# Allegro board PMOD2BNCSIMPLE_v1_03.brd
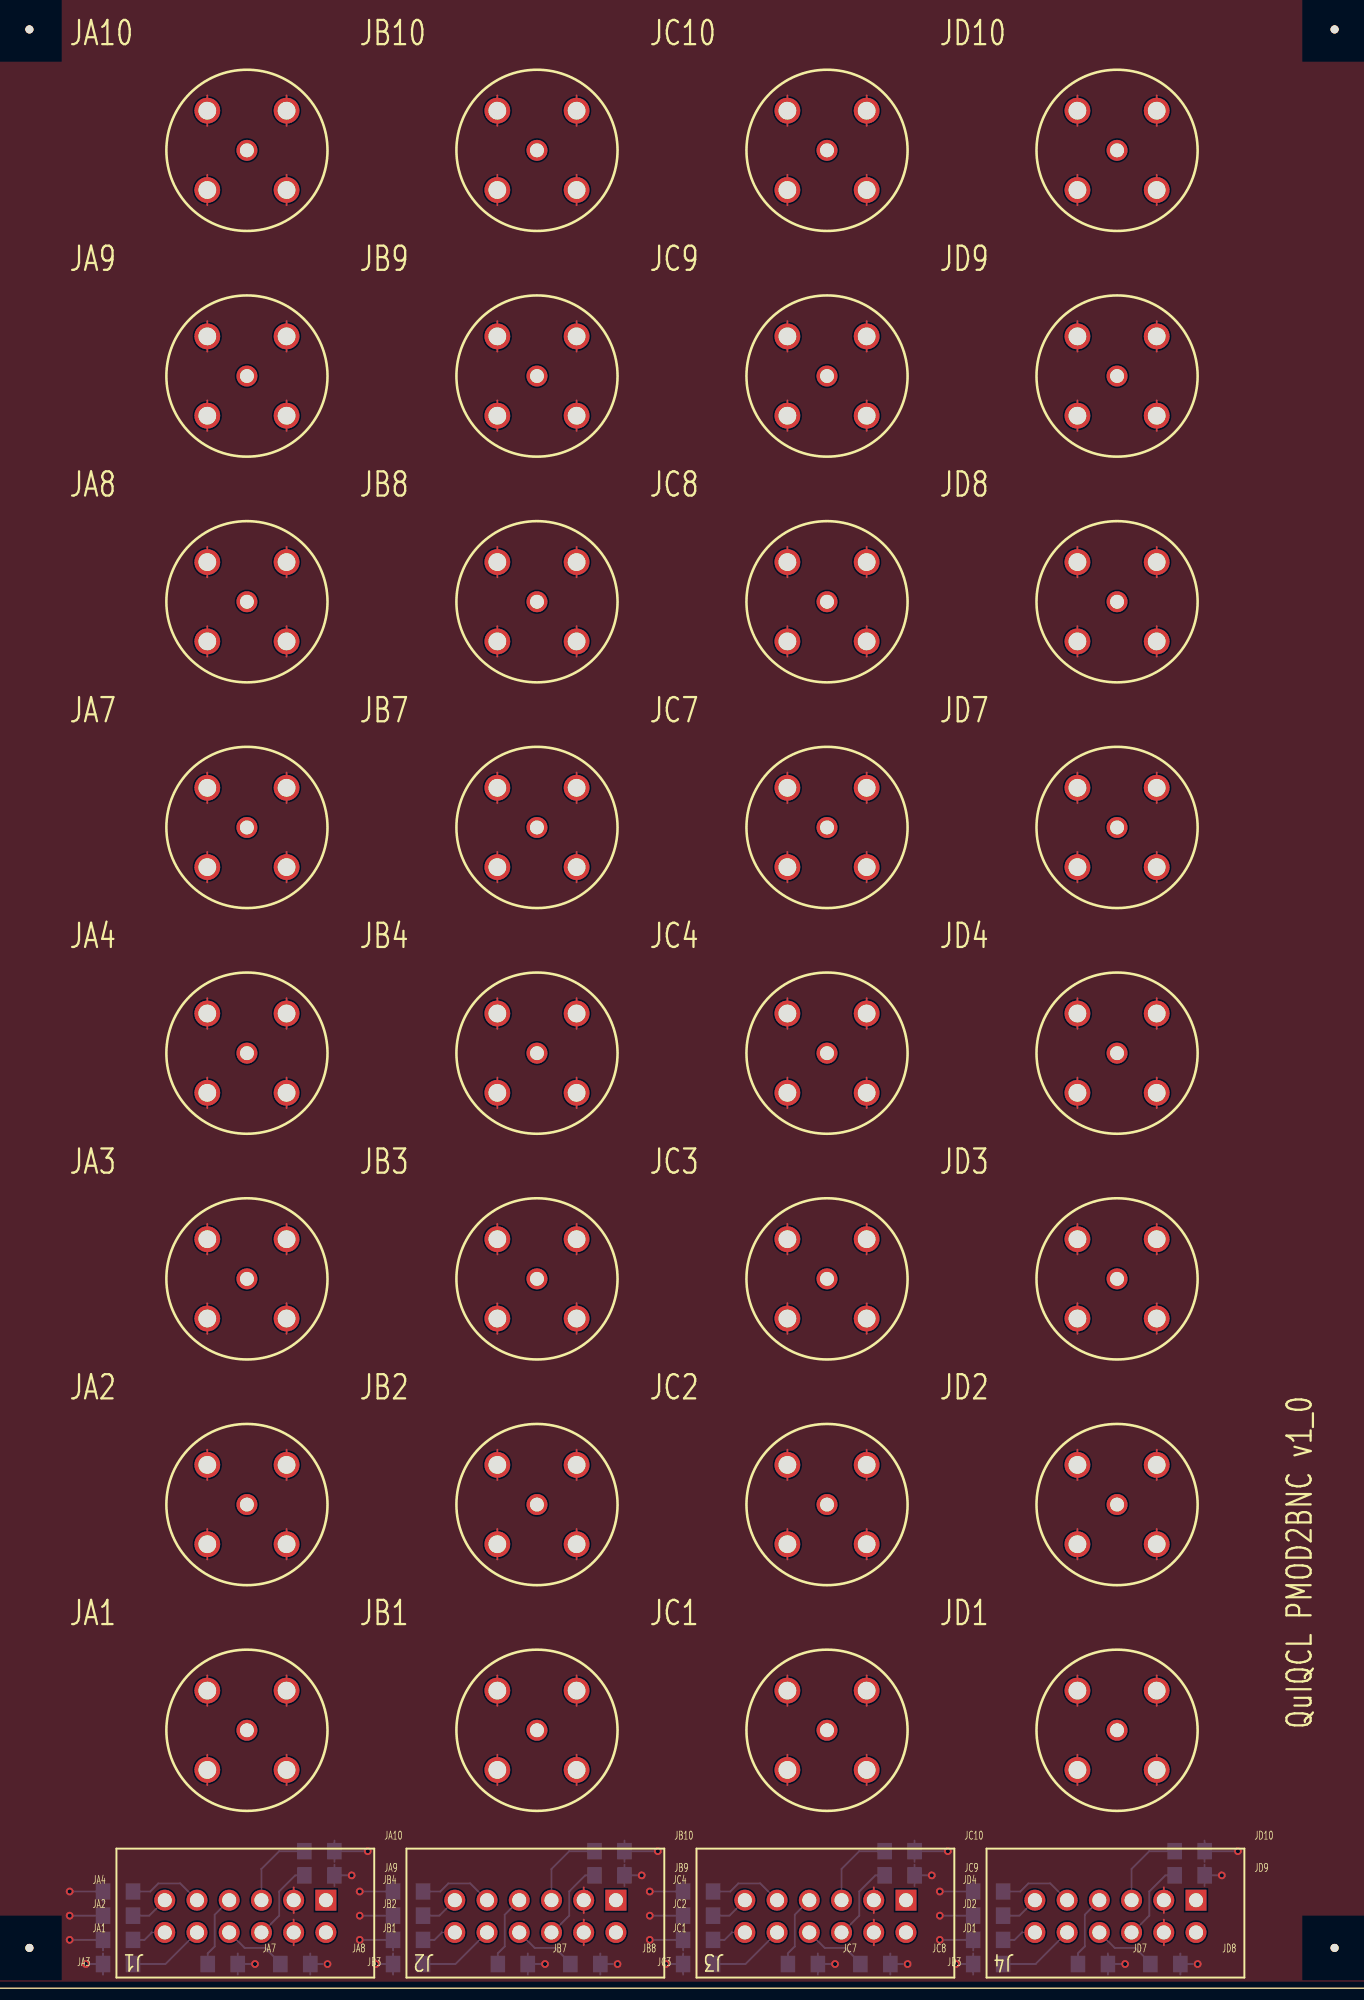
[diagram p0: board, top side]
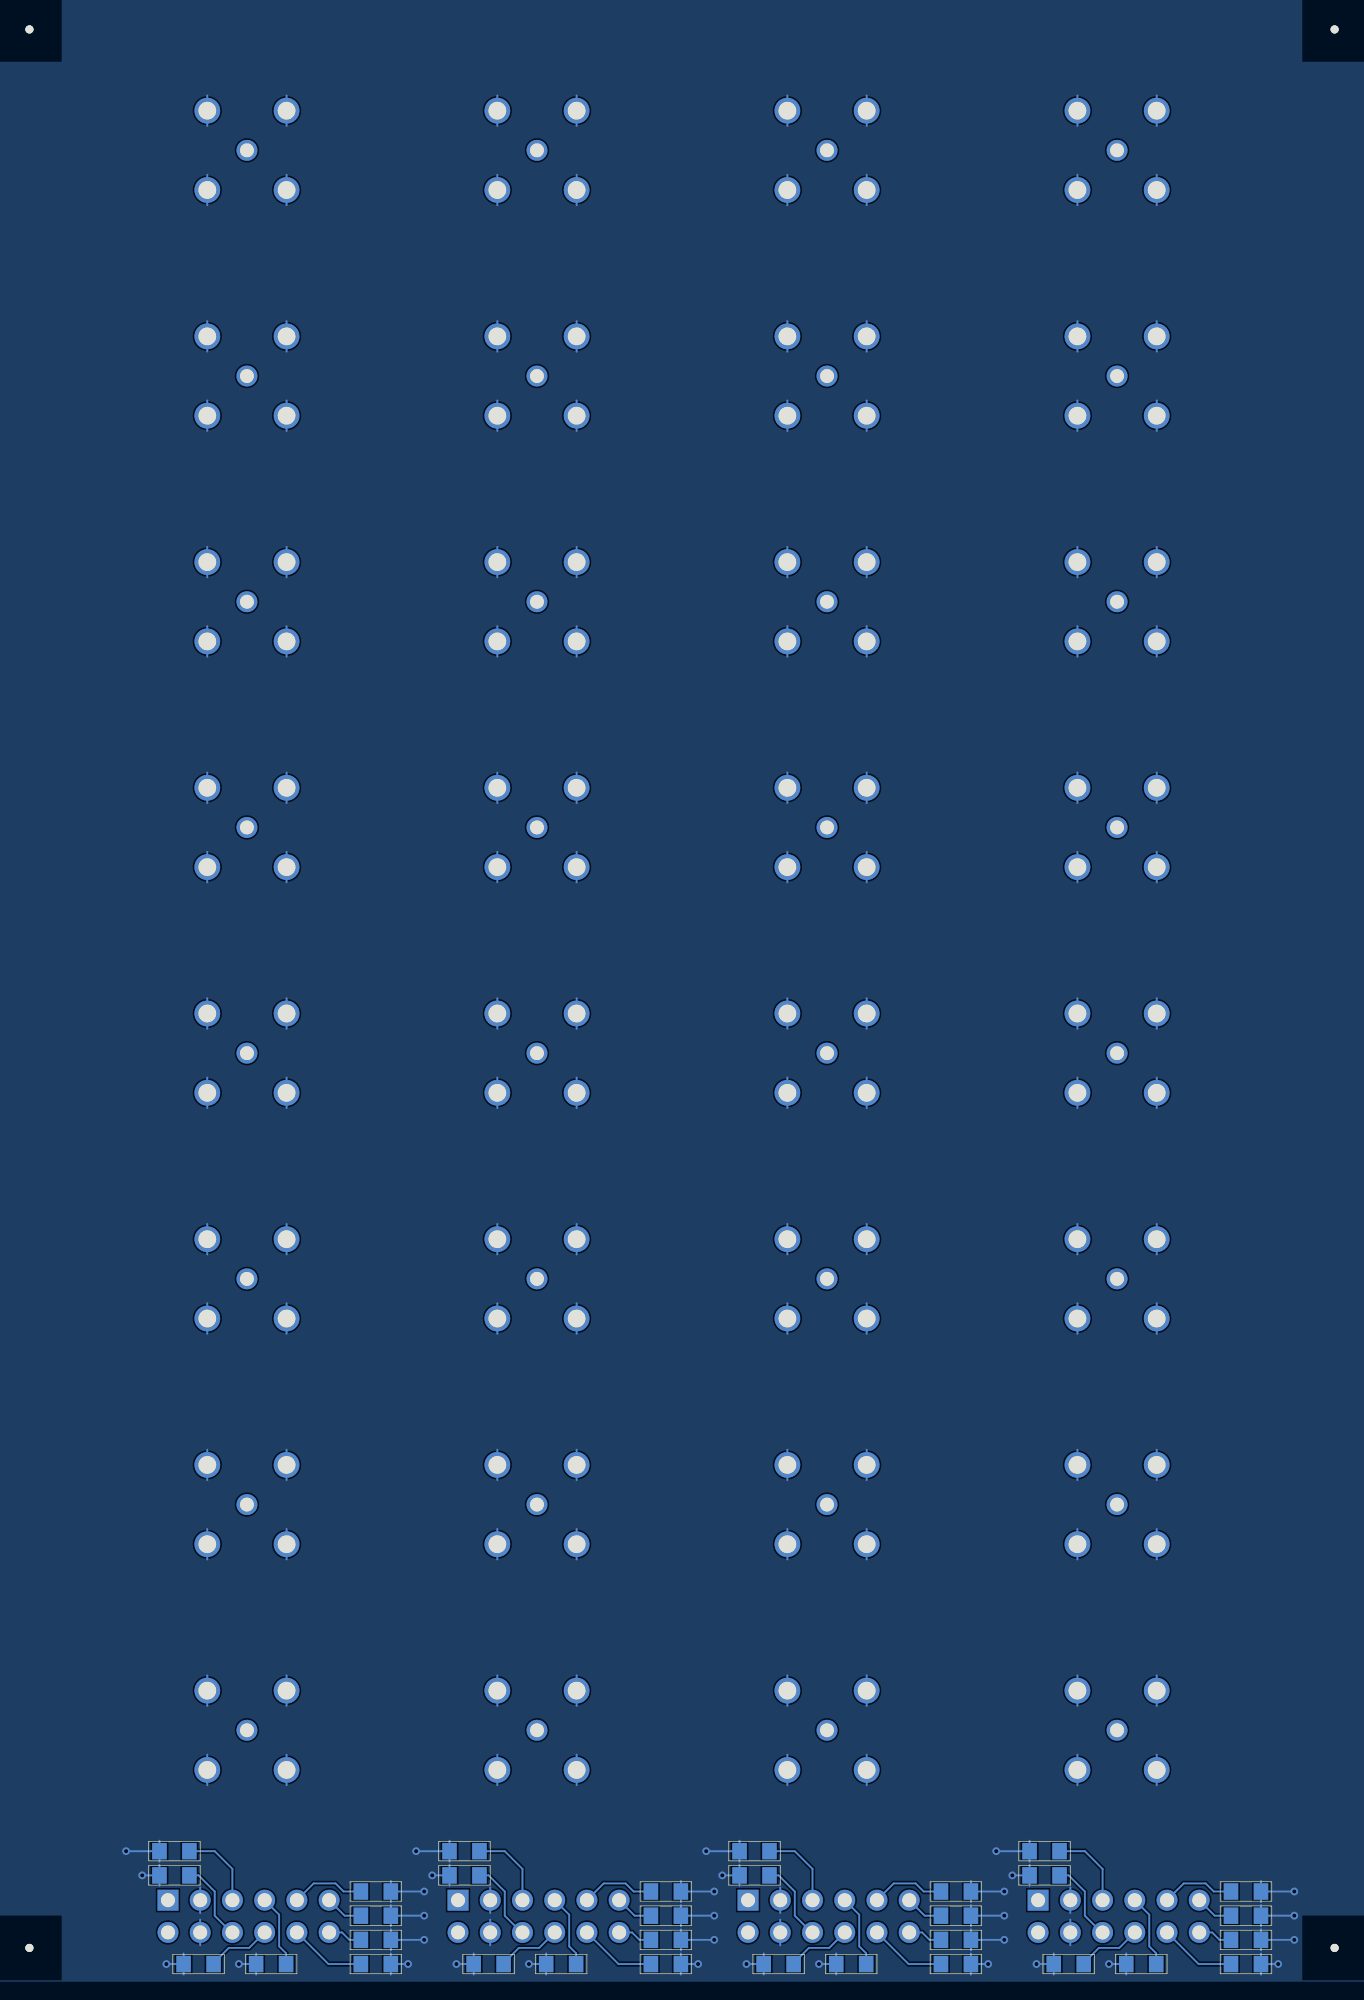
[diagram p1: board, bottom side, seen from below]

No outline. copper layers: TOP, SIGNAL, GND, BOTTOM. Coordinates in mm from the lowest, leftmost part position.

## Design rules (mm)
constraint set DEFAULT: min track width 0.127

## Placement (name value [footprint] x y rotation side)
BNC1  -  [MP-13-22-1]  17.14 19.48 0 top
BNC2  -  [MP-13-22-1]  17.14 37.26 0 top
BNC3  -  [MP-13-22-1]  17.14 55.04 0 top
BNC4  -  [MP-13-22-1]  17.14 72.82 0 top
BNC5  -  [MP-13-22-1]  17.14 90.6 0 top
BNC6  -  [MP-13-22-1]  17.14 108.38 0 top
BNC7  -  [MP-13-22-1]  17.14 126.16 0 top
BNC8  -  [MP-13-22-1]  17.14 143.94 0 top
BNC9  -  [MP-13-22-1]  40.01 19.48 0 top
BNC10  -  [MP-13-22-1]  40.01 37.26 0 top
BNC11  -  [MP-13-22-1]  40.01 55.04 0 top
BNC12  -  [MP-13-22-1]  40.01 72.82 0 top
BNC13  -  [MP-13-22-1]  40.01 90.6 0 top
BNC14  -  [MP-13-22-1]  40.01 108.38 0 top
BNC15  -  [MP-13-22-1]  40.01 126.16 0 top
BNC16  -  [MP-13-22-1]  40.01 143.94 0 top
BNC17  -  [MP-13-22-1]  62.87 19.48 0 top
BNC18  -  [MP-13-22-1]  62.87 37.26 0 top
BNC19  -  [MP-13-22-1]  62.87 55.04 0 top
BNC20  -  [MP-13-22-1]  62.87 72.82 0 top
BNC21  -  [MP-13-22-1]  62.87 90.6 0 top
BNC22  -  [MP-13-22-1]  62.87 108.38 0 top
BNC23  -  [MP-13-22-1]  62.87 126.16 0 top
BNC24  -  [MP-13-22-1]  62.87 143.94 0 top
BNC25  -  [MP-13-22-1]  85.73 19.48 0 top
BNC26  -  [MP-13-22-1]  85.73 37.26 0 top
BNC27  -  [MP-13-22-1]  85.73 55.04 0 top
BNC28  -  [MP-13-22-1]  85.73 72.82 0 top
BNC29  -  [MP-13-22-1]  85.73 90.6 0 top
BNC30  -  [MP-13-22-1]  85.73 108.38 0 top
BNC31  -  [MP-13-22-1]  85.73 126.16 0 top
BNC32  -  [MP-13-22-1]  85.73 143.94 0 top
J1  71764_0114  [717640112]  6.86 0 180 top
J2  71764_0114  [717640112]  29.72 0 180 top
J3  71764_0114  [717640112]  52.58 0 180 top
J4  71764_0114  [717640112]  75.44 0 180 top
NOREF  -  [unnamed]  102.87 153.47 0 top
NOREF#2  -  [unnamed]  0 2.34 0 top
NOREF#3  -  [unnamed]  102.87 2.34 0 top
NOREF#4  -  [unnamed]  0 153.47 0 top
R1  -  [RES_0805]  6.99 2.97 180 bottom
R2  -  [RES_0805]  6.99 4.88 180 bottom
R3  -  [RES_0805]  6.99 1.07 180 bottom
R4  -  [RES_0805]  6.99 6.78 180 bottom
R5  -  [RES_0805]  15.24 1.07 0 bottom
R6  -  [RES_0805]  20.95 1.07 0 bottom
R7  -  [RES_0805]  22.86 8.05 0 bottom
R8  -  [RES_0805]  22.86 9.96 0 bottom
R9  -  [RES_0805]  29.85 2.97 180 bottom
R10  -  [RES_0805]  29.85 4.88 180 bottom
R11  -  [RES_0805]  29.85 1.07 180 bottom
R12  -  [RES_0805]  29.85 6.78 180 bottom
R13  -  [RES_0805]  38.1 1.07 0 bottom
R14  -  [RES_0805]  43.82 1.07 0 bottom
R15  -  [RES_0805]  45.72 8.05 0 bottom
R16  -  [RES_0805]  45.72 9.96 0 bottom
R17  -  [RES_0805]  52.71 2.97 180 bottom
R18  -  [RES_0805]  52.71 4.88 180 bottom
R19  -  [RES_0805]  52.71 1.07 180 bottom
R20  -  [RES_0805]  52.71 6.78 180 bottom
R21  -  [RES_0805]  60.96 1.07 0 bottom
R22  -  [RES_0805]  66.67 1.07 0 bottom
R23  -  [RES_0805]  68.58 8.05 0 bottom
R24  -  [RES_0805]  68.58 9.96 0 bottom
R25  -  [RES_0805]  75.56 2.97 180 bottom
R26  -  [RES_0805]  75.56 4.88 180 bottom
R27  -  [RES_0805]  75.56 1.07 180 bottom
R28  -  [RES_0805]  75.56 6.78 180 bottom
R29  -  [RES_0805]  83.82 1.07 0 bottom
R30  -  [RES_0805]  89.53 1.07 0 bottom
R31  -  [RES_0805]  91.44 8.05 0 bottom
R32  -  [RES_0805]  91.44 9.96 0 bottom

## Library data of the parts
BNC1-BNC32 = MP-13-22-1
J1-J4 = 71764_0114
R1-R32 = RES_0805

## Footprints (pads in the part's own frame, mm; a bottom-side part is the same pattern mirrored in y, then rotated)
717640112
  rect 1.651x1.651 hole 1.1: 1(-16.51,-6.096)
  round 1.651 hole 1.1: 2(-16.51,-3.556) 3(-13.97,-6.096) 4(-13.97,-3.556) 5(-11.43,-6.096) 6(-11.43,-3.556) 7(-8.89,-6.096) 8(-8.89,-3.556) 9(-6.35,-6.096) 10(-6.35,-3.556) 11(-3.81,-6.096) 12(-3.81,-3.556)
MP-13-22-1
  round 2.032 hole 1.397: 1(3.124,3.124) 2(3.124,-3.124) 3(-3.124,-3.124) 4(-3.124,3.124)
  round 1.651 hole 1.092: 5(0,0)
RES_0805
  rect 1.151x1.3 smd: 1(1.181,0) 2(-1.181,0)
unnamed
  round 0.635 hole 3.175 unplated: (0,0)

## Nets
GND: BNC1.1 BNC1.2 BNC1.3 BNC1.4 BNC2.1 BNC2.2 BNC2.3 BNC2.4 BNC3.1 BNC3.2 BNC3.3 BNC3.4 BNC4.1 BNC4.2 BNC4.3 BNC4.4 BNC5.1 BNC5.2 BNC5.3 BNC5.4 BNC6.1 BNC6.2 BNC6.3 BNC6.4 BNC7.1 BNC7.2 BNC7.3 BNC7.4 BNC8.1 BNC8.2 BNC8.3 BNC8.4 BNC9.1 BNC9.2 BNC9.3 BNC9.4 BNC10.1 BNC10.2 BNC10.3 BNC10.4 BNC11.1 BNC11.2 BNC11.3 BNC11.4 BNC12.1 BNC12.2 BNC12.3 BNC12.4 BNC13.1 BNC13.2 BNC13.3 BNC13.4 BNC14.1 BNC14.2 BNC14.3 BNC14.4 BNC15.1 BNC15.2 BNC15.3 BNC15.4 BNC16.1 BNC16.2 BNC16.3 BNC16.4 BNC17.1 BNC17.2 BNC17.3 BNC17.4 BNC18.1 BNC18.2 BNC18.3 BNC18.4 BNC19.1 BNC19.2 BNC19.3 BNC19.4 BNC20.1 BNC20.2 BNC20.3 BNC20.4 BNC21.1 BNC21.2 BNC21.3 BNC21.4 BNC22.1 BNC22.2 BNC22.3 BNC22.4 BNC23.1 BNC23.2 BNC23.3 BNC23.4 BNC24.1 BNC24.2 BNC24.3 BNC24.4 BNC25.1 BNC25.2 BNC25.3 BNC25.4 BNC26.1 BNC26.2 BNC26.3 BNC26.4 BNC27.1 BNC27.2 BNC27.3 BNC27.4 BNC28.1 BNC28.2 BNC28.3 BNC28.4 BNC29.1 BNC29.2 BNC29.3 BNC29.4 BNC30.1 BNC30.2 BNC30.3 BNC30.4 BNC31.1 BNC31.2 BNC31.3 BNC31.4 BNC32.1 BNC32.2 BNC32.3 BNC32.4 J1.3 J1.4 J2.3 J2.4 J3.3 J3.4 J4.3 J4.4 R1.1 R2.1 R3.1 R4.1 R5.1 R6.1 R7.1 R8.1 R9.1 R10.1 R11.1 R12.1 R13.1 R14.1 R15.1 R16.1 R17.1 R18.1 R19.1 R20.1 R21.1 R22.1 R23.1 R24.1 R25.1 R26.1 R27.1 R28.1 R29.1 R30.1 R31.1 R32.1
N08480: BNC1.5(IO) J1.12 R1.2
N08489: BNC2.5(IO) J1.10 R3.2
N08507: BNC3.5(IO) J1.7 R5.2
N08519: BNC4.5(IO) J1.6 R7.2
N08544: BNC5.5(IO) J1.11 R2.2
N08556: BNC6.5(IO) J1.9 R4.2
N08588: BNC7.5(IO) J1.8 R6.2
N08600: BNC8.5(IO) J1.5 R8.2
N13592: BNC9.5(IO) J2.12 R9.2
N13596: BNC10.5(IO) J2.10 R11.2
N13604: BNC11.5(IO) J2.7 R13.2
N13610: BNC12.5(IO) J2.6 R15.2
N13620: BNC13.5(IO) J2.11 R10.2
N13626: BNC14.5(IO) J2.9 R12.2
N13636: BNC15.5(IO) J2.8 R14.2
N13642: BNC16.5(IO) J2.5 R16.2
N14473: BNC17.5(IO) J3.12 R17.2
N14477: BNC18.5(IO) J3.10 R19.2
N14485: BNC19.5(IO) J3.7 R21.2
N14491: BNC20.5(IO) J3.6 R23.2
N14501: BNC21.5(IO) J3.11 R18.2
N14507: BNC22.5(IO) J3.9 R20.2
N14517: BNC23.5(IO) J3.8 R22.2
N14523: BNC24.5(IO) J3.5 R24.2
N15354: BNC25.5(IO) J4.12 R25.2
N15358: BNC26.5(IO) J4.10 R27.2
N15366: BNC27.5(IO) J4.7 R29.2
N15372: BNC28.5(IO) J4.6 R31.2
N15382: BNC29.5(IO) J4.11 R26.2
N15388: BNC30.5(IO) J4.9 R28.2
N15398: BNC31.5(IO) J4.8 R30.2
N15404: BNC32.5(IO) J4.5 R32.2

Pads without a net: J1 1 2; J2 1 2; J3 1 2; J4 1 2

## Via types
v1: diameter 0.61, hole 0.33, TOP to BOTTOM, 32 vias

## Routing (per net, layer and track width the routed paths; a pad name or vN(x,y) marks a point on that pad's centre or on a via; arc(x,y) is an arc through that point)
GND: length 1409.3
  TOP w0.127: 14.02,59.36 BNC3.4 14.02,56.97 ; 36.88,142.02 BNC16.3 36.88,139.62 ; 82.6,39.19 BNC26.4 82.6,41.58 ; 65.99,59.36 BNC19.1 65.99,56.97 ; 14.02,17.56 BNC1.3 14.02,15.16 ; 88.85,106.46 BNC30.2 88.85,104.06 ; 20.27,35.34 BNC2.2 20.27,32.94 ; 43.13,53.12 BNC11.2 43.13,50.72 ; 59.74,50.72 BNC19.3 59.74,53.12 ; 65.99,68.5 BNC20.2 65.99,70.9 ; 65.99,92.53 BNC21.1 65.99,94.92 ; 43.13,121.84 BNC15.2 43.13,124.24 ; 82.6,142.02 BNC32.3 82.6,139.62 ; 59.74,56.97 BNC19.4 59.74,59.36 ; 88.85,70.9 BNC28.2 88.85,68.5 ; 65.99,112.7 BNC22.1 65.99,110.31 ; 36.88,41.58 BNC10.4 36.88,39.19 ; 59.74,74.75 BNC20.4 59.74,77.14 ; 59.74,112.7 BNC22.4 59.74,110.31 ; 65.99,130.48 BNC23.1 65.99,128.09 ; 20.27,15.16 BNC1.2 20.27,17.56 ; 20.27,23.8 BNC1.1 20.27,21.41 ; 82.6,35.34 BNC26.3 82.6,32.94 ; 36.88,130.48 BNC15.4 36.88,128.09 ; 82.6,21.41 BNC25.4 82.6,23.8 ; 82.6,94.92 BNC29.4 82.6,92.53 ; 88.85,139.62 BNC32.2 88.85,142.02 ; 88.85,148.26 BNC32.1 88.85,145.87 ; 36.88,53.12 BNC11.3 36.88,50.72 ; 82.6,121.84 BNC31.3 82.6,124.24 ; 65.99,145.87 BNC24.1 65.99,148.26 ; 59.74,32.94 BNC18.3 59.74,35.34 ; 66.55,2.55 J3.4 66.55,4.56 ; 65.99,121.84 BNC23.2 65.99,124.24 ; 59.74,92.53 BNC21.4 59.74,94.92 ; 59.74,68.5 BNC20.3 59.74,70.9 ; 36.88,124.24 BNC15.3 36.88,121.84 ; 82.6,77.14 BNC28.4 82.6,74.75 ; 36.88,56.97 BNC11.4 36.88,59.36 ; 20.27,70.9 BNC4.2 20.27,68.5 ; 88.85,23.8 BNC25.1 88.85,21.41 ; 36.88,112.7 BNC14.4 36.88,110.31 ; 43.13,17.56 BNC9.2 43.13,15.16 ; 59.74,41.58 BNC18.4 59.74,39.19 ; 82.6,53.12 BNC27.3 82.6,50.72 ; 43.69,4.56 J2.4 43.69,2.55 ; 59.74,21.41 BNC17.4 59.74,23.8 ; 65.99,104.06 BNC22.2 65.99,106.46 ; 36.88,23.8 BNC9.4 36.88,21.41 ; 43.69,5.09 J2.3 43.69,7.1 ; 20.83,5.09 J1.3 20.83,7.1 ; 36.88,104.06 BNC14.3 36.88,106.46 ; 65.99,39.19 BNC18.1 65.99,41.58 ; 36.88,32.94 BNC10.3 36.88,35.34 ; 36.88,148.26 BNC16.4 36.88,145.87 ; 14.02,104.06 BNC6.3 14.02,106.46 ; 14.02,92.53 BNC5.4 14.02,94.92 ; 65.99,23.8 BNC17.1 65.99,21.41 ; 36.88,74.75 BNC12.4 36.88,77.14 ; 89.41,7.1 J4.3 89.41,5.09 ; 20.27,110.31 BNC6.1 20.27,112.7 ; 82.6,106.46 BNC30.3 82.6,104.06 ; 20.27,106.46 BNC6.2 20.27,104.06 ; 82.6,86.28 BNC29.3 82.6,88.68 ; 36.88,70.9 BNC12.3 36.88,68.5 ; 20.27,130.48 BNC7.1 20.27,128.09 ; 43.13,92.53 BNC13.1 43.13,94.92 ; 43.13,35.34 BNC10.2 43.13,32.94 ; 65.99,142.02 BNC24.2 65.99,139.62 ; 20.27,74.75 BNC4.1 20.27,77.14 ; 82.6,110.31 BNC30.4 82.6,112.7 ; 88.85,88.68 BNC29.2 88.85,86.28 ; 14.02,39.19 BNC2.4 14.02,41.58 ; 88.85,50.72 BNC27.2 88.85,53.12 ; 14.02,68.5 BNC4.3 14.02,70.9 ; 59.74,17.56 BNC17.3 59.74,15.16 ; 20.27,145.87 BNC8.1 20.27,148.26 ; 14.02,32.94 BNC2.3 14.02,35.34 ; 14.02,50.72 BNC3.3 14.02,53.12 ; 82.6,56.97 BNC27.4 82.6,59.36 ; 65.99,77.14 BNC20.1 65.99,74.75 ; 14.02,124.24 BNC7.3 14.02,121.84 ; 43.13,39.19 BNC10.1 43.13,41.58 ; 88.85,130.48 BNC31.1 88.85,128.09 ; 20.27,39.19 BNC2.1 20.27,41.58 ; 82.6,15.16 BNC25.3 82.6,17.56 ; 20.27,53.12 BNC3.2 20.27,50.72 ; 88.85,17.56 BNC25.2 88.85,15.16 ; 88.85,121.84 BNC31.2 88.85,124.24 ; 43.13,86.28 BNC13.2 43.13,88.68 ; 14.02,145.87 BNC8.4 14.02,148.26 ; 14.02,74.75 BNC4.4 14.02,77.14 ; 43.13,106.46 BNC14.2 43.13,104.06 ; 66.55,5.09 J3.3 66.55,7.1 ; 65.99,15.16 BNC17.2 65.99,17.56 ; 59.74,148.26 BNC24.4 59.74,145.87 ; 88.85,32.94 BNC26.2 88.85,35.34 ; 43.13,148.26 BNC16.1 43.13,145.87 ; 43.13,21.41 BNC9.1 43.13,23.8 ; 82.6,130.48 BNC31.4 82.6,128.09 ; 88.85,77.14 BNC28.1 88.85,74.75 ; 20.27,139.62 BNC8.2 20.27,142.02 ; 65.99,50.72 BNC19.2 65.99,53.12 ; 36.88,15.16 BNC9.3 36.88,17.56 ; 88.85,39.19 BNC26.1 88.85,41.58 ; 82.6,70.9 BNC28.3 82.6,68.5 ; 36.88,88.68 BNC13.3 36.88,86.28 ; 59.74,130.48 BNC23.4 59.74,128.09 ; 14.02,110.31 BNC6.4 14.02,112.7 ; 36.88,92.53 BNC13.4 36.88,94.92 ; 59.74,104.06 BNC22.3 59.74,106.46 ; 14.02,86.28 BNC5.3 14.02,88.68 ; 14.02,139.62 BNC8.3 14.02,142.02 ; 43.13,68.5 BNC12.2 43.13,70.9 ; 82.6,148.26 BNC32.4 82.6,145.87 ; 20.83,4.56 J1.4 20.83,2.55 ; 14.02,130.48 BNC7.4 14.02,128.09 ; 43.13,56.97 BNC11.1 43.13,59.36 ; 20.27,92.53 BNC5.1 20.27,94.92 ; 43.13,110.31 BNC14.1 43.13,112.7 ; 43.13,142.02 BNC16.2 43.13,139.62 ; 20.27,56.97 BNC3.1 20.27,59.36 ; 59.74,121.84 BNC23.3 59.74,124.24 ; 88.85,110.31 BNC30.1 88.85,112.7 ; 65.99,88.68 BNC21.2 65.99,86.28 ; 65.99,35.34 BNC18.2 65.99,32.94 ; 59.74,86.28 BNC21.3 59.74,88.68 ; 43.13,128.09 BNC15.1 43.13,130.48 ; 43.13,74.75 BNC12.1 43.13,77.14 ; 59.74,139.62 BNC24.3 59.74,142.02 ; 88.85,94.92 BNC29.1 88.85,92.53 ; 89.41,2.55 J4.4 89.41,4.56 ; 14.02,21.41 BNC1.4 14.02,23.8 ; 88.85,56.97 BNC27.1 88.85,59.36 ; 20.27,86.28 BNC5.2 20.27,88.68 ; 20.27,124.24 BNC7.2 20.27,121.84
  SIGNAL w0.112: 65.99,74.75 BNC20.1 65.99,77.14 ; 43.13,112.7 BNC14.1 43.13,110.31 ; 82.6,50.72 BNC27.3 82.6,53.12 ; 14.02,124.24 BNC7.3 14.02,121.84 ; 82.6,41.58 BNC26.4 82.6,39.19 ; 59.74,17.56 BNC17.3 59.74,15.16 ; 14.02,110.31 BNC6.4 14.02,112.7 ; 88.85,21.41 BNC25.1 88.85,23.8 ; 65.99,53.12 BNC19.2 65.99,50.72 ; 88.85,86.28 BNC29.2 88.85,88.68 ; 14.02,32.94 BNC2.3 14.02,35.34 ; 59.74,110.31 BNC22.4 59.74,112.7 ; 36.88,53.12 BNC11.3 36.88,50.72 ; 43.13,35.34 BNC10.2 43.13,32.94 ; 65.99,17.56 BNC17.2 65.99,15.16 ; 14.02,139.62 BNC8.3 14.02,142.02 ; 14.02,56.97 BNC3.4 14.02,59.36 ; 88.85,15.16 BNC25.2 88.85,17.56 ; 59.74,104.06 BNC22.3 59.74,106.46 ; 66.55,7.1 J3.3 66.55,5.09 ; 43.13,50.72 BNC11.2 43.13,53.12 ; 43.13,92.53 BNC13.1 43.13,94.92 ; 36.88,139.62 BNC16.3 36.88,142.02 ; 43.13,70.9 BNC12.2 43.13,68.5 ; 20.83,5.09 J1.3 20.83,7.1 ; 14.02,86.28 BNC5.3 14.02,88.68 ; 43.13,145.87 BNC16.1 43.13,148.26 ; 65.99,139.62 BNC24.2 65.99,142.02 ; 82.6,121.84 BNC31.3 82.6,124.24 ; 20.27,59.36 BNC3.1 20.27,56.97 ; 43.69,5.09 J2.3 43.69,7.1 ; 20.27,21.41 BNC1.1 20.27,23.8 ; 14.02,68.5 BNC4.3 14.02,70.9 ; 43.13,121.84 BNC15.2 43.13,124.24 ; 59.74,74.75 BNC20.4 59.74,77.14 ; 20.27,130.48 BNC7.1 20.27,128.09 ; 82.6,130.48 BNC31.4 82.6,128.09 ; 20.27,148.26 BNC8.1 20.27,145.87 ; 59.74,94.92 BNC21.4 59.74,92.53 ; 36.88,41.58 BNC10.4 36.88,39.19 ; 82.6,15.16 BNC25.3 82.6,17.56 ; 66.55,4.56 J3.4 66.55,2.55 ; 88.85,68.5 BNC28.2 88.85,70.9 ; 59.74,70.9 BNC20.3 59.74,68.5 ; 59.74,41.58 BNC18.4 59.74,39.19 ; 89.41,4.56 J4.4 89.41,2.55 ; 36.88,110.31 BNC14.4 36.88,112.7 ; 59.74,121.84 BNC23.3 59.74,124.24 ; 82.6,148.26 BNC32.4 82.6,145.87 ; 36.88,77.14 BNC12.4 36.88,74.75 ; 36.88,21.41 BNC9.4 36.88,23.8 ; 65.99,148.26 BNC24.1 65.99,145.87 ; 20.27,50.72 BNC3.2 20.27,53.12 ; 82.6,35.34 BNC26.3 82.6,32.94 ; 59.74,130.48 BNC23.4 59.74,128.09 ; 20.27,70.9 BNC4.2 20.27,68.5 ; 88.85,142.02 BNC32.2 88.85,139.62 ; 59.74,56.97 BNC19.4 59.74,59.36 ; 14.02,92.53 BNC5.4 14.02,94.92 ; 20.27,77.14 BNC4.1 20.27,74.75 ; 65.99,88.68 BNC21.2 65.99,86.28 ; 20.27,86.28 BNC5.2 20.27,88.68 ; 36.88,128.09 BNC15.4 36.88,130.48 ; 88.85,56.97 BNC27.1 88.85,59.36 ; 36.88,124.24 BNC15.3 36.88,121.84 ; 82.6,139.62 BNC32.3 82.6,142.02 ; 14.02,106.46 BNC6.3 14.02,104.06 ; 82.6,70.9 BNC28.3 82.6,68.5 ; 88.85,148.26 BNC32.1 88.85,145.87 ; 65.99,39.19 BNC18.1 65.99,41.58 ; 59.74,139.62 BNC24.3 59.74,142.02 ; 43.13,41.58 BNC10.1 43.13,39.19 ; 20.27,139.62 BNC8.2 20.27,142.02 ; 43.13,23.8 BNC9.1 43.13,21.41 ; 65.99,128.09 BNC23.1 65.99,130.48 ; 36.88,145.87 BNC16.4 36.88,148.26 ; 65.99,68.5 BNC20.2 65.99,70.9 ; 20.27,104.06 BNC6.2 20.27,106.46 ; 20.27,124.24 BNC7.2 20.27,121.84 ; 14.02,148.26 BNC8.4 14.02,145.87 ; 65.99,112.7 BNC22.1 65.99,110.31 ; 59.74,53.12 BNC19.3 59.74,50.72 ; 20.27,15.16 BNC1.2 20.27,17.56 ; 43.13,59.36 BNC11.1 43.13,56.97 ; 65.99,92.53 BNC21.1 65.99,94.92 ; 20.27,110.31 BNC6.1 20.27,112.7 ; 82.6,110.31 BNC30.4 82.6,112.7 ; 43.69,4.56 J2.4 43.69,2.55 ; 65.99,106.46 BNC22.2 65.99,104.06 ; 20.27,32.94 BNC2.2 20.27,35.34 ; 36.88,35.34 BNC10.3 36.88,32.94 ; 82.6,86.28 BNC29.3 82.6,88.68 ; 20.83,2.55 J1.4 20.83,4.56 ; 43.13,77.14 BNC12.1 43.13,74.75 ; 82.6,21.41 BNC25.4 82.6,23.8 ; 14.02,15.16 BNC1.3 14.02,17.56 ; 89.41,7.1 J4.3 89.41,5.09 ; 59.74,32.94 BNC18.3 59.74,35.34 ; 88.85,110.31 BNC30.1 88.85,112.7 ; 65.99,32.94 BNC18.2 65.99,35.34 ; 88.85,74.75 BNC28.1 88.85,77.14 ; 59.74,23.8 BNC17.4 59.74,21.41 ; 88.85,39.19 BNC26.1 88.85,41.58 ; 65.99,121.84 BNC23.2 65.99,124.24 ; 82.6,56.97 BNC27.4 82.6,59.36 ; 82.6,104.06 BNC30.3 82.6,106.46 ; 36.88,15.16 BNC9.3 36.88,17.56 ; 65.99,23.8 BNC17.1 65.99,21.41 ; 36.88,106.46 BNC14.3 36.88,104.06 ; 88.85,104.06 BNC30.2 88.85,106.46 ; 36.88,86.28 BNC13.3 36.88,88.68 ; 14.02,77.14 BNC4.4 14.02,74.75 ; 88.85,53.12 BNC27.2 88.85,50.72 ; 36.88,56.97 BNC11.4 36.88,59.36 ; 59.74,145.87 BNC24.4 59.74,148.26 ; 14.02,50.72 BNC3.3 14.02,53.12 ; 43.13,104.06 BNC14.2 43.13,106.46 ; 43.13,15.16 BNC9.2 43.13,17.56 ; 88.85,94.92 BNC29.1 88.85,92.53 ; 43.13,139.62 BNC16.2 43.13,142.02 ; 14.02,128.09 BNC7.4 14.02,130.48 ; 59.74,88.68 BNC21.3 59.74,86.28 ; 36.88,92.53 BNC13.4 36.88,94.92 ; 88.85,130.48 BNC31.1 88.85,128.09 ; 14.02,23.8 BNC1.4 14.02,21.41 ; 36.88,68.5 BNC12.3 36.88,70.9 ; 82.6,92.53 BNC29.4 82.6,94.92 ; 88.85,35.34 BNC26.2 88.85,32.94 ; 43.13,130.48 BNC15.1 43.13,128.09 ; 82.6,77.14 BNC28.4 82.6,74.75 ; 20.27,94.92 BNC5.1 20.27,92.53 ; 43.13,86.28 BNC13.2 43.13,88.68 ; 20.27,41.58 BNC2.1 20.27,39.19 ; 88.85,124.24 BNC31.2 88.85,121.84 ; 14.02,41.58 BNC2.4 14.02,39.19 ; 65.99,56.97 BNC19.1 65.99,59.36
  GND w0.127: 43.13,23.8 BNC9.1 43.13,21.41 ; 14.02,130.48 BNC7.4 14.02,128.09 ; 82.6,92.53 BNC29.4 82.6,94.92 ; 43.13,17.56 BNC9.2 43.13,15.16 ; 43.13,50.72 BNC11.2 43.13,53.12 ; 43.13,130.48 BNC15.1 43.13,128.09 ; 20.27,139.62 BNC8.2 20.27,142.02 ; 59.74,142.02 BNC24.3 59.74,139.62 ; 14.02,148.26 BNC8.4 14.02,145.87 ; 43.13,142.02 BNC16.2 43.13,139.62 ; 59.74,59.36 BNC19.4 59.74,56.97 ; 14.02,94.92 BNC5.4 14.02,92.53 ; 43.13,104.06 BNC14.2 43.13,106.46 ; 20.27,110.31 BNC6.1 20.27,112.7 ; 59.74,88.68 BNC21.3 59.74,86.28 ; 82.6,23.8 BNC25.4 82.6,21.41 ; 65.99,21.41 BNC17.1 65.99,23.8 ; 14.02,53.12 BNC3.3 14.02,50.72 ; 59.74,145.87 BNC24.4 59.74,148.26 ; 59.74,17.56 BNC17.3 59.74,15.16 ; 14.02,74.75 BNC4.4 14.02,77.14 ; 20.27,41.58 BNC2.1 20.27,39.19 ; 82.6,17.56 BNC25.3 82.6,15.16 ; 88.85,77.14 BNC28.1 88.85,74.75 ; 36.88,92.53 BNC13.4 36.88,94.92 ; 20.27,130.48 BNC7.1 20.27,128.09 ; 43.13,68.5 BNC12.2 43.13,70.9 ; 59.74,50.72 BNC19.3 59.74,53.12 ; 82.6,88.68 BNC29.3 82.6,86.28 ; 82.6,124.24 BNC31.3 82.6,121.84 ; 20.27,23.8 BNC1.1 20.27,21.41 ; 65.99,145.87 BNC24.1 65.99,148.26 ; 14.02,17.56 BNC1.3 14.02,15.16 ; 36.88,110.31 BNC14.4 36.88,112.7 ; 88.85,50.72 BNC27.2 88.85,53.12 ; 82.6,77.14 BNC28.4 82.6,74.75 ; 14.02,23.8 BNC1.4 14.02,21.41 ; 43.69,2.55 J2.4 43.69,4.56 ; 59.74,77.14 BNC20.4 59.74,74.75 ; 43.13,112.7 BNC14.1 43.13,110.31 ; 14.02,88.68 BNC5.3 14.02,86.28 ; 82.6,32.94 BNC26.3 82.6,35.34 ; 36.88,21.41 BNC9.4 36.88,23.8 ; 65.99,110.31 BNC22.1 65.99,112.7 ; 59.74,35.34 BNC18.3 59.74,32.94 ; 88.85,94.92 BNC29.1 88.85,92.53 ; 66.55,5.09 J3.3 66.55,7.1 ; 36.88,74.75 BNC12.4 36.88,77.14 ; 82.6,68.5 BNC28.3 82.6,70.9 ; 82.6,53.12 BNC27.3 82.6,50.72 ; 14.02,104.06 BNC6.3 14.02,106.46 ; 14.02,35.34 BNC2.3 14.02,32.94 ; 88.85,148.26 BNC32.1 88.85,145.87 ; 36.88,15.16 BNC9.3 36.88,17.56 ; 20.83,7.1 J1.3 20.83,5.09 ; 14.02,110.31 BNC6.4 14.02,112.7 ; 59.74,130.48 BNC23.4 59.74,128.09 ; 36.88,124.24 BNC15.3 36.88,121.84 ; 43.13,35.34 BNC10.2 43.13,32.94 ; 36.88,39.19 BNC10.4 36.88,41.58 ; 65.99,92.53 BNC21.1 65.99,94.92 ; 88.85,124.24 BNC31.2 88.85,121.84 ; 20.27,77.14 BNC4.1 20.27,74.75 ; 36.88,142.02 BNC16.3 36.88,139.62 ; 36.88,148.26 BNC16.4 36.88,145.87 ; 20.27,53.12 BNC3.2 20.27,50.72 ; 43.13,88.68 BNC13.2 43.13,86.28 ; 88.85,23.8 BNC25.1 88.85,21.41 ; 20.27,92.53 BNC5.1 20.27,94.92 ; 65.99,130.48 BNC23.1 65.99,128.09 ; 65.99,74.75 BNC20.1 65.99,77.14 ; 65.99,15.16 BNC17.2 65.99,17.56 ; 43.13,148.26 BNC16.1 43.13,145.87 ; 43.13,41.58 BNC10.1 43.13,39.19 ; 59.74,39.19 BNC18.4 59.74,41.58 ; 36.88,50.72 BNC11.3 36.88,53.12 ; 82.6,59.36 BNC27.4 82.6,56.97 ; 88.85,106.46 BNC30.2 88.85,104.06 ; 20.27,35.34 BNC2.2 20.27,32.94 ; 14.02,68.5 BNC4.3 14.02,70.9 ; 65.99,59.36 BNC19.1 65.99,56.97 ; 82.6,41.58 BNC26.4 82.6,39.19 ; 59.74,112.7 BNC22.4 59.74,110.31 ; 14.02,41.58 BNC2.4 14.02,39.19 ; 43.13,92.53 BNC13.1 43.13,94.92 ; 20.27,121.84 BNC7.2 20.27,124.24 ; 89.41,7.1 J4.3 89.41,5.09 ; 20.27,86.28 BNC5.2 20.27,88.68 ; 65.99,121.84 BNC23.2 65.99,124.24 ; 20.27,106.46 BNC6.2 20.27,104.06 ; 88.85,86.28 BNC29.2 88.85,88.68 ; 43.13,74.75 BNC12.1 43.13,77.14 ; 88.85,112.7 BNC30.1 88.85,110.31 ; 36.88,56.97 BNC11.4 36.88,59.36 ; 20.27,15.16 BNC1.2 20.27,17.56 ; 36.88,128.09 BNC15.4 36.88,130.48 ; 59.74,23.8 BNC17.4 59.74,21.41 ; 14.02,142.02 BNC8.3 14.02,139.62 ; 88.85,130.48 BNC31.1 88.85,128.09 ; 14.02,121.84 BNC7.3 14.02,124.24 ; 89.41,4.56 J4.4 89.41,2.55 ; 20.27,148.26 BNC8.1 20.27,145.87 ; 88.85,39.19 BNC26.1 88.85,41.58 ; 20.27,68.5 BNC4.2 20.27,70.9 ; 88.85,59.36 BNC27.1 88.85,56.97 ; 82.6,112.7 BNC30.4 82.6,110.31 ; 88.85,15.16 BNC25.2 88.85,17.56 ; 66.55,4.56 J3.4 66.55,2.55 ; 65.99,106.46 BNC22.2 65.99,104.06 ; 65.99,39.19 BNC18.1 65.99,41.58 ; 59.74,70.9 BNC20.3 59.74,68.5 ; 82.6,142.02 BNC32.3 82.6,139.62 ; 20.83,2.55 J1.4 20.83,4.56 ; 65.99,88.68 BNC21.2 65.99,86.28 ; 82.6,145.87 BNC32.4 82.6,148.26 ; 88.85,142.02 BNC32.2 88.85,139.62 ; 36.88,35.34 BNC10.3 36.88,32.94 ; 36.88,86.28 BNC13.3 36.88,88.68 ; 14.02,56.97 BNC3.4 14.02,59.36 ; 59.74,104.06 BNC22.3 59.74,106.46 ; 43.13,124.24 BNC15.2 43.13,121.84 ; 82.6,106.46 BNC30.3 82.6,104.06 ; 36.88,70.9 BNC12.3 36.88,68.5 ; 59.74,124.24 BNC23.3 59.74,121.84 ; 88.85,35.34 BNC26.2 88.85,32.94 ; 65.99,68.5 BNC20.2 65.99,70.9 ; 88.85,68.5 BNC28.2 88.85,70.9 ; 43.69,5.09 J2.3 43.69,7.1 ; 65.99,53.12 BNC19.2 65.99,50.72 ; 59.74,92.53 BNC21.4 59.74,94.92 ; 36.88,106.46 BNC14.3 36.88,104.06 ; 43.13,59.36 BNC11.1 43.13,56.97 ; 82.6,128.09 BNC31.4 82.6,130.48 ; 65.99,32.94 BNC18.2 65.99,35.34 ; 20.27,56.97 BNC3.1 20.27,59.36 ; 65.99,139.62 BNC24.2 65.99,142.02
  BOTTOM w0.145: 20.27,110.31 BNC6.1 20.27,112.7 ; 65.99,50.72 BNC19.2 65.99,53.12 ; 88.85,68.5 BNC28.2 88.85,70.9 ; R32.1 v1(95.25,9.96) ; R32.1 92.62,9.12 ; R32.1 92.62,10.79 ; 88.85,35.34 BNC26.2 88.85,32.94 ; 82.6,17.56 BNC25.3 82.6,15.16 ; R24.1 v1(72.39,9.96) ; R24.1 69.76,10.79 ; R24.1 69.76,9.12 ; 14.02,88.68 BNC5.3 14.02,86.28 ; 36.88,104.06 BNC14.3 36.88,106.46 ; 67.86,0.23 R22.1 ; R22.1 v1(69.22,1.07) ; R22.1 67.86,1.9 ; 20.27,41.58 BNC2.1 20.27,39.19 ; 14.02,104.06 BNC6.3 14.02,106.46 ; 36.88,88.68 BNC13.3 36.88,86.28 ; R2.1 v1(3.17,4.88) ; R2.1 5.8,4.04 ; R2.1 5.8,5.71 ; 36.88,124.24 BNC15.3 36.88,121.84 ; 43.69,7.1 J2.3 43.69,5.09 ; 59.74,77.14 BNC20.4 59.74,74.75 ; 82.6,39.19 BNC26.4 82.6,41.58 ; 36.88,21.41 BNC9.4 36.88,23.8 ; R9.1 28.66,3.8 ; R9.1 v1(26.04,2.97) ; R9.1 28.66,2.14 ; 59.74,121.84 BNC23.3 59.74,124.24 ; R20.1 v1(48.9,6.78) ; R20.1 51.52,5.95 ; R20.1 51.52,7.61 ; 65.99,88.68 BNC21.2 65.99,86.28 ; 88.85,148.26 BNC32.1 88.85,145.87 ; 36.88,139.62 BNC16.3 36.88,142.02 ; 82.6,21.41 BNC25.4 82.6,23.8 ; 82.6,32.94 BNC26.3 82.6,35.34 ; 88.85,130.48 BNC31.1 88.85,128.09 ; 20.27,124.24 BNC7.2 20.27,121.84 ; 43.13,70.9 BNC12.2 43.13,68.5 ; 51.52,0.23 51.52,1.07 ; 51.52,1.07 v1(50.17,1.07) ; 51.52,1.07 51.52,1.9 ; 88.85,17.56 BNC25.2 88.85,15.16 ; 65.99,59.36 BNC19.1 65.99,56.97 ; R14.1 45,1.9 ; R14.1 v1(46.36,1.07) ; R14.1 45,0.23 ; 14.02,124.24 BNC7.3 14.02,121.84 ; R12.1 v1(26.04,6.78) ; R12.1 28.66,5.95 ; R12.1 28.66,7.61 ; 88.85,53.12 BNC27.2 88.85,50.72 ; 36.88,53.12 BNC11.3 36.88,50.72 ; 14.02,23.8 BNC1.4 14.02,21.41 ; 43.13,139.62 BNC16.2 43.13,142.02 ; 36.88,145.87 BNC16.4 36.88,148.26 ; 88.85,77.14 BNC28.1 88.85,74.75 ; 20.27,148.26 BNC8.1 20.27,145.87 ; 43.13,17.56 BNC9.2 43.13,15.16 ; 65.99,70.9 BNC20.2 65.99,68.5 ; 20.27,106.46 BNC6.2 20.27,104.06 ; R26.1 74.38,5.71 ; R26.1 v1(71.76,4.88) ; R26.1 74.38,4.04 ; 14.02,128.09 BNC7.4 14.02,130.48 ; 36.88,41.58 BNC10.4 36.88,39.19 ; 59.74,50.72 BNC19.3 59.74,53.12 ; 88.85,106.46 BNC30.2 88.85,104.06 ; 43.69,4.56 J2.4 43.69,2.55 ; 65.99,21.41 BNC17.1 65.99,23.8 ; 82.6,56.97 BNC27.4 82.6,59.36 ; 14.02,77.14 BNC4.4 14.02,74.75 ; 43.13,23.8 BNC9.1 43.13,21.41 ; 20.83,7.1 J1.3 20.83,5.09 ; 43.13,56.97 BNC11.1 43.13,59.36 ; R25.1 v1(71.76,2.97) ; R25.1 74.38,2.14 ; R25.1 74.38,3.8 ; 59.74,142.02 BNC24.3 59.74,139.62 ; 82.6,124.24 BNC31.3 82.6,121.84 ; 14.02,148.26 BNC8.4 14.02,145.87 ; R13.1 39.28,1.9 ; R13.1 v1(40.64,1.07) ; R13.1 39.28,0.23 ; 59.74,110.31 BNC22.4 59.74,112.7 ; 20.83,4.56 J1.4 20.83,2.55 ; 59.74,86.28 BNC21.3 59.74,88.68 ; R1.1 v1(3.17,2.97) ; R1.1 5.8,2.14 ; R1.1 5.8,3.8 ; R30.1 90.72,1.9 ; R30.1 v1(92.08,1.07) ; R30.1 90.72,0.23 ; 43.13,124.24 BNC15.2 43.13,121.84 ; 59.74,128.09 BNC23.4 59.74,130.48 ; 16.42,0.23 R5.1 ; R5.1 v1(17.78,1.07) ; R5.1 16.42,1.9 ; 20.27,35.34 BNC2.2 20.27,32.94 ; 14.02,92.53 BNC5.4 14.02,94.92 ; 36.88,74.75 BNC12.4 36.88,77.14 ; 36.88,70.9 BNC12.3 36.88,68.5 ; 43.13,130.48 BNC15.1 43.13,128.09 ; R18.1 51.52,5.71 ; R18.1 v1(48.9,4.88) ; R18.1 51.52,4.04 ; 59.74,70.9 BNC20.3 59.74,68.5 ; 43.13,41.58 BNC10.1 43.13,39.19 ; 36.88,35.34 BNC10.3 36.88,32.94 ; 82.6,92.53 BNC29.4 82.6,94.92 ; 14.02,56.97 BNC3.4 14.02,59.36 ; 43.13,77.14 BNC12.1 43.13,74.75 ; 82.6,86.28 BNC29.3 82.6,88.68 ; 59.74,23.8 BNC17.4 59.74,21.41 ; 59.74,17.56 BNC17.3 59.74,15.16 ; 66.55,7.1 J3.3 66.55,5.09 ; R29.1 85,1.9 ; R29.1 v1(86.36,1.07) ; R29.1 85,0.23 ; 14.02,112.7 BNC6.4 14.02,110.31 ; 82.6,53.12 BNC27.3 82.6,50.72 ; 82.6,68.5 BNC28.3 82.6,70.9 ; 65.99,106.46 BNC22.2 65.99,104.06 ; 20.27,59.36 BNC3.1 20.27,56.97 ; R16.1 v1(49.53,9.96) ; R16.1 46.9,10.79 ; R16.1 46.9,9.12 ; 74.38,1.07 v1(73.03,1.07) ; 74.38,1.07 74.38,0.23 ; 74.38,1.07 74.38,1.9 ; 36.88,15.16 BNC9.3 36.88,17.56 ; R10.1 28.66,5.71 ; R10.1 28.66,4.04 ; R10.1 v1(26.04,4.88) ; R17.1 51.52,3.8 ; R17.1 51.52,2.14 ; R17.1 v1(48.9,2.97) ; 14.02,68.5 BNC4.3 14.02,70.9 ; 43.13,92.53 BNC13.1 43.13,94.92 ; 92.62,7.22 R31.1 ; R31.1 92.62,8.88 ; R31.1 v1(93.98,8.05) ; 65.99,142.02 BNC24.2 65.99,139.62 ; R15.1 46.9,8.88 ; R15.1 v1(48.26,8.05) ; R15.1 46.9,7.22 ; 65.99,15.16 BNC17.2 65.99,17.56 ; 14.02,39.19 BNC2.4 14.02,41.58 ; 82.6,104.06 BNC30.3 82.6,106.46 ; 59.74,94.92 BNC21.4 59.74,92.53 ; 88.85,110.31 BNC30.1 88.85,112.7 ; 20.27,128.09 BNC7.1 20.27,130.48 ; R28.1 v1(71.76,6.78) ; R28.1 74.38,5.95 ; R28.1 74.38,7.61 ; 5.8,0.23 5.8,1.07 ; 5.8,1.07 v1(4.45,1.07) ; 5.8,1.07 5.8,1.9 ; 82.6,112.7 BNC30.4 82.6,110.31 ; 82.6,128.09 BNC31.4 82.6,130.48 ; 36.88,130.48 BNC15.4 36.88,128.09 ; R4.1 v1(3.17,6.78) ; R4.1 5.8,7.61 ; R4.1 5.8,5.95 ; R23.1 69.76,8.88 ; R23.1 69.76,7.22 ; R23.1 v1(71.12,8.05) ; R21.1 62.14,1.9 ; R21.1 62.14,0.23 ; R21.1 v1(63.5,1.07) ; R7.1 24.04,8.88 ; R7.1 24.04,7.22 ; R7.1 v1(25.4,8.05) ; 43.13,104.06 BNC14.2 43.13,106.46 ; 20.27,53.12 BNC3.2 20.27,50.72 ; 36.88,59.36 BNC11.4 36.88,56.97 ; 89.41,2.55 J4.4 89.41,4.56 ; 36.88,92.53 BNC13.4 36.88,94.92 ; 88.85,124.24 BNC31.2 88.85,121.84 ; 59.74,39.19 BNC18.4 59.74,41.58 ; 20.27,70.9 BNC4.2 20.27,68.5 ; 65.99,77.14 BNC20.1 65.99,74.75 ; 59.74,106.46 BNC22.3 59.74,104.06 ; 43.13,53.12 BNC11.2 43.13,50.72 ; 65.99,124.24 BNC23.2 65.99,121.84 ; 82.6,77.14 BNC28.4 82.6,74.75 ; 20.27,74.75 BNC4.1 20.27,77.14 ; 36.88,110.31 BNC14.4 36.88,112.7 ; 88.85,139.62 BNC32.2 88.85,142.02 ; 14.02,35.34 BNC2.3 14.02,32.94 ; 59.74,148.26 BNC24.4 59.74,145.87 ; 22.14,0.23 R6.1 ; R6.1 22.14,1.9 ; R6.1 v1(23.5,1.07) ; 59.74,59.36 BNC19.4 59.74,56.97 ; 43.13,112.7 BNC14.1 43.13,110.31 ; 65.99,130.48 BNC23.1 65.99,128.09 ; 89.41,5.09 J4.3 89.41,7.1 ; 66.55,2.55 J3.4 66.55,4.56 ; 43.13,86.28 BNC13.2 43.13,88.68 ; 20.27,142.02 BNC8.2 20.27,139.62 ; 88.85,39.19 BNC26.1 88.85,41.58 ; 65.99,39.19 BNC18.1 65.99,41.58 ; 20.27,15.16 BNC1.2 20.27,17.56 ; 59.74,35.34 BNC18.3 59.74,32.94 ; 28.66,0.23 28.66,1.07 ; 28.66,1.07 28.66,1.9 ; 28.66,1.07 v1(27.3,1.07) ; 14.02,17.56 BNC1.3 14.02,15.16 ; 65.99,92.53 BNC21.1 65.99,94.92 ; 43.13,148.26 BNC16.1 43.13,145.87 ; 88.85,23.8 BNC25.1 88.85,21.41 ; 20.27,88.68 BNC5.2 20.27,86.28 ; 43.13,32.94 BNC10.2 43.13,35.34 ; 88.85,92.53 BNC29.1 88.85,94.92 ; 65.99,112.7 BNC22.1 65.99,110.31 ; 65.99,145.87 BNC24.1 65.99,148.26 ; 14.02,139.62 BNC8.3 14.02,142.02 ; R8.1 v1(26.67,9.96) ; R8.1 24.04,9.12 ; R8.1 24.04,10.79 ; 65.99,32.94 BNC18.2 65.99,35.34 ; 20.27,92.53 BNC5.1 20.27,94.92 ; 88.85,56.97 BNC27.1 88.85,59.36 ; 14.02,53.12 BNC3.3 14.02,50.72 ; 82.6,142.02 BNC32.3 82.6,139.62 ; 20.27,23.8 BNC1.1 20.27,21.41 ; 88.85,86.28 BNC29.2 88.85,88.68 ; 82.6,145.87 BNC32.4 82.6,148.26
N08480: length 155.3
  TOP w0.127: BNC1.5 17.02,19.48
  SIGNAL w0.112: J1.12 8.89,5.33 8.89,7.42 10.8,9.32 10.8,12.5 11.43,13.13 18.41,13.13 19.05,13.77 19.05,14.4 17.78,15.67 16.51,15.67 15.24,14.4 11.43,14.4 10.8,15.04 10.8,17.58 11.43,18.21 13.34,18.21 13.97,18.85 13.97,20.12 13.34,20.75 11.43,20.75 10.8,21.39 10.8,23.93 11.43,24.56 14.61,24.56 15.24,25.2 15.24,25.83 14.61,26.47 11.43,26.47 10.88,27.02 10.88,27.82 11.43,28.37 14.61,28.37 15.24,29.01 15.24,29.64 14.61,30.28 11.43,30.28 10.8,30.91 10.8,43.61 11.43,44.25 20.21,44.25 20.95,43.5 20.95,43.09 20.21,42.34 12.7,42.34 12.07,41.71 12.07,32.82 12.7,32.18 22.22,32.18 22.86,31.55 22.86,30.91 22.22,30.28 19.05,30.28 18.41,29.64 18.41,29.01 19.05,28.37 22.22,28.37 22.86,27.74 22.86,27.1 22.22,26.47 19.05,26.47 18.41,25.83 18.41,25.2 19.05,24.56 22.22,24.56 22.86,23.93 22.86,18.85 22.22,18.21 18.41,18.21 BNC1.5
  BOTTOM w0.145: J1.12 9.65,3.56 9.07,2.97 R1.2
N08489: length 155
  SIGNAL w0.112: BNC2.5 21.59,37.26 22.86,38.53 22.86,48.69 22.22,49.33 18.41,49.33 17.78,48.69 17.78,46.79 17.14,46.15 16.51,46.15 15.88,46.79 15.88,48.69 15.24,49.33 14.61,49.33 13.97,48.69 13.97,46.79 13.34,46.15 12.07,46.15 11.43,46.79 11.43,62.66 12.07,63.3 13.97,63.3 14.61,62.66 14.61,61.39 15.24,60.76 15.88,60.76 16.51,61.39 16.51,62.66 17.14,63.3 17.78,63.3 18.41,62.66 18.41,61.39 19.05,60.76 19.68,60.76 20.32,61.39 20.32,64.57 19.68,65.2 10.16,65.2 9.52,64.57 9.52,9.96 7.62,8.05 7.62,4.24 9.52,2.34 11.99,2.34 J1.10
  GND w0.127: BNC2.5 17.02,37.26
  BOTTOM w0.145: J1.10 10.72,1.07 R3.2
N08507: length 155.5
  SIGNAL w0.112: 17.02,55.04 BNC3.5 20.95,55.04 22.59,56.68 22.59,65.47 20.95,67.11 13.34,67.11 12.07,68.38 12.07,77.9 12.7,78.54 17.14,78.54 17.78,79.17 17.78,82.98 17.14,83.62 8.89,83.62 8.25,82.98 8.25,10.59 6.35,8.69 6.35,3.61 8.25,1.7 13.34,1.7 14.61,2.97 14.61,4.95 J1.7
  BOTTOM w0.145: J1.7 14.61,4.95 14.61,2.46 14.06,1.91 R5.2
N08519: length 155.5
  SIGNAL w0.112: J1.6 15.16,0.43 7.62,0.43 5.08,2.97 5.08,9.32 6.99,11.23 6.99,95.05 7.62,95.68 10.8,95.68 11.43,95.05 11.43,86.79 13.34,84.89 20.95,84.89 22.86,82.98 22.86,75.36 20.32,72.82 BNC4.5 17.02,72.82
  BOTTOM w0.145: R7.2 20.95,8.05 19.68,6.78 19.68,4.88 18.36,3.56 J1.6
N08544: length 155
  SIGNAL w0.112: BNC5.5 17.14,96.32 15.24,98.22 8.25,98.22 7.62,98.86 7.62,109.02 8.25,109.65 10.8,109.65 11.43,109.02 11.43,104.57 13.34,102.67 22.22,102.67 24.13,100.76 24.13,15.67 20.32,11.86 16.43,11.86 J1.11
  BOTTOM w0.145: R2.2 9.45,4.88 J1.11
N08556: length 155.6
  SIGNAL w0.112: BNC6.5 17.14,110.92 14.61,113.46 12.07,113.46 11.43,114.1 11.43,119.81 12.07,120.45 23.5,120.45 25.4,118.54 25.4,15.04 20.95,10.59 17.7,10.59 J1.9
  BOTTOM w0.145: J1.9 11.89,7.42 10.16,7.42 9.52,6.78 R4.2
N08588: length 155.5
  SIGNAL w0.112: 17.02,126.16 BNC7.5 17.14,131.88 18.41,133.15 25.4,133.15 26.67,131.88 26.67,14.4 21.59,9.32 19.68,9.32 17.14,6.78 17.14,4.95 J1.8
  BOTTOM w0.145: J1.8 16.97,2.34 18.58,2.34 19.77,1.14 R6.2
N08600: length 155.9
  SIGNAL w0.112: 17.02,143.94 BNC8.5 20.32,143.94 27.94,136.32 27.94,13.77 22.22,8.05 20.24,8.05 J1.5
  BOTTOM w0.145: J1.5 18.29,8.56 19.68,9.96 R8.2
N13592: length 155.3
  TOP w0.127: BNC9.5 39.88,19.48
  SIGNAL w0.112: BNC9.5 41.28,18.21 45.09,18.21 45.72,18.85 45.72,23.93 45.09,24.56 41.91,24.56 41.28,25.2 41.28,25.83 41.91,26.47 45.09,26.47 45.72,27.1 45.72,27.74 45.09,28.37 41.91,28.37 41.28,29.01 41.28,29.64 41.91,30.28 45.09,30.28 45.72,30.91 45.72,31.55 45.09,32.18 35.56,32.18 34.93,32.82 34.93,41.71 35.56,42.34 43.07,42.34 43.82,43.09 43.82,43.5 43.07,44.25 34.29,44.25 33.66,43.61 33.66,30.91 34.29,30.28 37.47,30.28 38.1,29.64 38.1,29.01 37.47,28.37 34.29,28.37 33.74,27.82 33.74,27.02 34.29,26.47 37.47,26.47 38.1,25.83 38.1,25.2 37.47,24.56 34.29,24.56 33.66,23.93 33.66,21.39 34.29,20.75 36.2,20.75 36.83,20.12 36.83,18.85 36.2,18.21 34.29,18.21 33.66,17.58 33.66,15.04 34.29,14.4 38.1,14.4 39.37,15.67 40.64,15.67 41.91,14.4 41.91,13.77 41.28,13.13 34.29,13.13 33.66,12.5 33.66,9.32 31.75,7.42 31.75,5.33 J2.12
  BOTTOM w0.145: R9.2 31.93,2.97 32.51,3.56 J2.12
N13596: length 155
  SIGNAL w0.112: BNC10.5 44.45,37.26 45.72,38.53 45.72,48.69 45.09,49.33 41.28,49.33 40.64,48.69 40.64,46.79 40.01,46.15 39.37,46.15 38.73,46.79 38.73,48.69 38.1,49.33 37.47,49.33 36.83,48.69 36.83,46.79 36.2,46.15 34.93,46.15 34.29,46.79 34.29,62.66 34.93,63.3 36.83,63.3 37.47,62.66 37.47,61.39 38.1,60.76 38.73,60.76 39.37,61.39 39.37,62.66 40.01,63.3 40.64,63.3 41.28,62.66 41.28,61.39 41.91,60.76 42.55,60.76 43.18,61.39 43.18,64.57 42.55,65.2 33.02,65.2 32.39,64.57 32.39,9.96 30.48,8.05 30.48,4.24 32.39,2.34 34.85,2.34 J2.10
  GND w0.127: BNC10.5 39.88,37.26
  BOTTOM w0.145: R11.2 33.58,1.07 J2.10
N13604: length 155.5
  SIGNAL w0.112: J2.7 37.47,4.95 37.47,2.97 36.2,1.7 31.11,1.7 29.21,3.61 29.21,8.69 31.11,10.59 31.11,82.98 31.75,83.62 40.01,83.62 40.64,82.98 40.64,79.17 40.01,78.54 35.56,78.54 34.93,77.9 34.93,68.38 36.2,67.11 43.82,67.11 45.45,65.47 45.45,56.68 43.81,55.04 BNC11.5 39.88,55.04
  BOTTOM w0.145: R13.2 36.92,1.91 37.47,2.46 37.47,4.95 J2.7
N13610: length 155.5
  SIGNAL w0.112: J2.6 38.02,0.43 30.48,0.43 27.94,2.97 27.94,9.32 29.85,11.23 29.85,95.05 30.48,95.68 33.66,95.68 34.29,95.05 34.29,86.79 36.2,84.89 43.82,84.89 45.72,82.98 45.72,75.36 43.18,72.82 BNC12.5 39.88,72.82
  BOTTOM w0.145: J2.6 41.22,3.56 42.55,4.88 42.55,6.78 43.82,8.05 R15.2
N13620: length 155
  SIGNAL w0.112: J2.11 39.29,11.86 43.18,11.86 46.99,15.67 46.99,100.76 45.09,102.67 36.2,102.67 34.29,104.57 34.29,109.02 33.66,109.65 31.11,109.65 30.48,109.02 30.48,98.86 31.11,98.22 38.1,98.22 40.01,96.32 BNC13.5
  BOTTOM w0.145: R10.2 32.31,4.88 J2.11
N13626: length 155.6
  SIGNAL w0.112: BNC14.5 40.01,110.92 37.47,113.46 34.93,113.46 34.29,114.1 34.29,119.81 34.93,120.45 46.36,120.45 48.26,118.54 48.26,15.04 43.82,10.59 40.56,10.59 J2.9
  BOTTOM w0.145: J2.9 34.75,7.42 33.02,7.42 32.39,6.78 R12.2
N13636: length 155.5
  SIGNAL w0.112: J2.8 40.01,4.95 40.01,6.78 42.55,9.32 44.45,9.32 49.53,14.4 49.53,131.88 48.26,133.15 41.28,133.15 40.01,131.88 BNC15.5 39.88,126.16
  BOTTOM w0.145: R14.2 42.63,1.14 41.44,2.34 39.83,2.34 J2.8
N13642: length 155.9
  SIGNAL w0.112: 39.88,143.94 BNC16.5 43.18,143.94 50.8,136.32 50.8,13.77 45.09,8.05 43.1,8.05 J2.5
  BOTTOM w0.145: J2.5 41.15,8.56 42.55,9.96 R16.2
N14473: length 155.3
  TOP w0.127: BNC17.5 62.74,19.48
  SIGNAL w0.112: BNC17.5 64.14,18.21 67.95,18.21 68.58,18.85 68.58,23.93 67.95,24.56 64.77,24.56 64.14,25.2 64.14,25.83 64.77,26.47 67.95,26.47 68.58,27.1 68.58,27.74 67.95,28.37 64.77,28.37 64.14,29.01 64.14,29.64 64.77,30.28 67.95,30.28 68.58,30.91 68.58,31.55 67.95,32.18 58.42,32.18 57.79,32.82 57.79,41.71 58.42,42.34 65.93,42.34 66.67,43.09 66.67,43.5 65.93,44.25 57.15,44.25 56.52,43.61 56.52,30.91 57.15,30.28 60.33,30.28 60.96,29.64 60.96,29.01 60.33,28.37 57.15,28.37 56.6,27.82 56.6,27.02 57.15,26.47 60.33,26.47 60.96,25.83 60.96,25.2 60.33,24.56 57.15,24.56 56.52,23.93 56.52,21.39 57.15,20.75 59.05,20.75 59.69,20.12 59.69,18.85 59.05,18.21 57.15,18.21 56.52,17.58 56.52,15.04 57.15,14.4 60.96,14.4 62.23,15.67 63.5,15.67 64.77,14.4 64.77,13.77 64.14,13.13 57.15,13.13 56.52,12.5 56.52,9.32 54.61,7.42 54.61,5.33 J3.12
  BOTTOM w0.145: J3.12 55.37,3.56 54.79,2.97 R17.2
N14477: length 155
  SIGNAL w0.112: BNC18.5 67.31,37.26 68.58,38.53 68.58,48.69 67.95,49.33 64.14,49.33 63.5,48.69 63.5,46.79 62.87,46.15 62.23,46.15 61.59,46.79 61.59,48.69 60.96,49.33 60.33,49.33 59.69,48.69 59.69,46.79 59.05,46.15 57.79,46.15 57.15,46.79 57.15,62.66 57.79,63.3 59.69,63.3 60.33,62.66 60.33,61.39 60.96,60.76 61.59,60.76 62.23,61.39 62.23,62.66 62.87,63.3 63.5,63.3 64.14,62.66 64.14,61.39 64.77,60.76 65.41,60.76 66.04,61.39 66.04,64.57 65.41,65.2 55.88,65.2 55.25,64.57 55.25,9.96 53.34,8.05 53.34,4.24 55.25,2.34 57.71,2.34 J3.10
  GND w0.127: BNC18.5 62.74,37.26
  BOTTOM w0.145: J3.10 56.44,1.07 R19.2
N14485: length 155.5
  SIGNAL w0.112: 62.74,55.04 BNC19.5 66.67,55.04 68.31,56.68 68.31,65.47 66.67,67.11 59.05,67.11 57.79,68.38 57.79,77.9 58.42,78.54 62.87,78.54 63.5,79.17 63.5,82.98 62.87,83.62 54.61,83.62 53.98,82.98 53.98,10.59 52.07,8.69 52.07,3.61 53.98,1.7 59.05,1.7 60.33,2.97 60.33,4.95 J3.7
  BOTTOM w0.145: J3.7 60.33,4.95 60.33,2.46 59.78,1.91 R21.2
N14491: length 155.5
  SIGNAL w0.112: J3.6 60.88,0.43 53.34,0.43 50.8,2.97 50.8,9.32 52.71,11.23 52.71,95.05 53.34,95.68 56.52,95.68 57.15,95.05 57.15,86.79 59.05,84.89 66.67,84.89 68.58,82.98 68.58,75.36 66.04,72.82 BNC20.5 62.74,72.82
  BOTTOM w0.145: R23.2 66.67,8.05 65.41,6.78 65.41,4.88 64.08,3.56 J3.6
N14501: length 155
  SIGNAL w0.112: BNC21.5 62.87,96.32 60.96,98.22 53.98,98.22 53.34,98.86 53.34,109.02 53.98,109.65 56.52,109.65 57.15,109.02 57.15,104.57 59.05,102.67 67.95,102.67 69.85,100.76 69.85,15.67 66.04,11.86 62.15,11.86 J3.11
  BOTTOM w0.145: J3.11 55.17,4.88 R18.2
N14507: length 155.6
  SIGNAL w0.112: J3.9 63.42,10.59 66.67,10.59 71.12,15.04 71.12,118.54 69.22,120.45 57.79,120.45 57.15,119.81 57.15,114.1 57.79,113.46 60.33,113.46 62.87,110.92 BNC22.5
  BOTTOM w0.145: R20.2 55.25,6.78 55.88,7.42 57.61,7.42 J3.9
N14517: length 155.5
  SIGNAL w0.112: 62.74,126.16 BNC23.5 62.87,131.88 64.14,133.15 71.12,133.15 72.39,131.88 72.39,14.4 67.31,9.32 65.41,9.32 62.87,6.78 62.87,4.95 J3.8
  BOTTOM w0.145: R22.2 65.49,1.14 64.3,2.34 62.69,2.34 J3.8
N14523: length 155.9
  SIGNAL w0.112: J3.5 65.96,8.05 67.95,8.05 73.66,13.77 73.66,136.32 66.04,143.94 BNC24.5 62.74,143.94
  BOTTOM w0.145: J3.5 64.01,8.56 65.41,9.96 R24.2
N15354: length 155.3
  TOP w0.127: BNC25.5 85.6,19.48
  SIGNAL w0.112: BNC25.5 87,18.21 90.81,18.21 91.44,18.85 91.44,23.93 90.81,24.56 87.63,24.56 87,25.2 87,25.83 87.63,26.47 90.81,26.47 91.44,27.1 91.44,27.74 90.81,28.37 87.63,28.37 87,29.01 87,29.64 87.63,30.28 90.81,30.28 91.44,30.91 91.44,31.55 90.81,32.18 81.28,32.18 80.64,32.82 80.64,41.71 81.28,42.34 88.79,42.34 89.53,43.09 89.53,43.5 88.79,44.25 80.01,44.25 79.38,43.61 79.38,30.91 80.01,30.28 83.19,30.28 83.82,29.64 83.82,29.01 83.19,28.37 80.01,28.37 79.46,27.82 79.46,27.02 80.01,26.47 83.19,26.47 83.82,25.83 83.82,25.2 83.19,24.56 80.01,24.56 79.38,23.93 79.38,21.39 80.01,20.75 81.92,20.75 82.55,20.12 82.55,18.85 81.92,18.21 80.01,18.21 79.38,17.58 79.38,15.04 80.01,14.4 83.82,14.4 85.09,15.67 86.36,15.67 87.63,14.4 87.63,13.77 87,13.13 80.01,13.13 79.38,12.5 79.38,9.32 77.47,7.42 77.47,5.33 J4.12
  BOTTOM w0.145: R25.2 77.65,2.97 78.23,3.56 J4.12
N15358: length 155
  SIGNAL w0.112: J4.10 80.57,2.34 78.11,2.34 76.2,4.24 76.2,8.05 78.11,9.96 78.11,64.57 78.74,65.2 88.27,65.2 88.9,64.57 88.9,61.39 88.27,60.76 87.63,60.76 87,61.39 87,62.66 86.36,63.3 85.73,63.3 85.09,62.66 85.09,61.39 84.45,60.76 83.82,60.76 83.19,61.39 83.19,62.66 82.55,63.3 80.64,63.3 80.01,62.66 80.01,46.79 80.64,46.15 81.92,46.15 82.55,46.79 82.55,48.69 83.19,49.33 83.82,49.33 84.45,48.69 84.45,46.79 85.09,46.15 85.73,46.15 86.36,46.79 86.36,48.69 87,49.33 90.81,49.33 91.44,48.69 91.44,38.53 90.17,37.26 BNC26.5
  GND w0.127: BNC26.5 85.6,37.26
  BOTTOM w0.145: J4.10 79.3,1.07 R27.2
N15366: length 155.5
  SIGNAL w0.112: J4.7 83.19,4.95 83.19,2.97 81.92,1.7 76.84,1.7 74.93,3.61 74.93,8.69 76.84,10.59 76.84,82.98 77.47,83.62 85.73,83.62 86.36,82.98 86.36,79.17 85.73,78.54 81.28,78.54 80.64,77.9 80.64,68.38 81.92,67.11 89.53,67.11 91.17,65.47 91.17,56.68 89.53,55.04 BNC27.5 85.6,55.04
  BOTTOM w0.145: J4.7 83.19,4.95 83.19,2.46 82.64,1.91 R29.2
N15372: length 155.5
  SIGNAL w0.112: J4.6 83.74,0.43 76.2,0.43 73.66,2.97 73.66,9.32 75.56,11.23 75.56,95.05 76.2,95.68 79.38,95.68 80.01,95.05 80.01,86.79 81.92,84.89 89.53,84.89 91.44,82.98 91.44,75.36 88.9,72.82 BNC28.5 85.6,72.82
  BOTTOM w0.145: R31.2 89.53,8.05 88.27,6.78 88.27,4.88 86.94,3.56 J4.6
N15382: length 155
  SIGNAL w0.112: BNC29.5 85.73,96.32 83.82,98.22 76.84,98.22 76.2,98.86 76.2,109.02 76.84,109.65 79.38,109.65 80.01,109.02 80.01,104.57 81.92,102.67 90.81,102.67 92.71,100.76 92.71,15.67 88.9,11.86 85.01,11.86 J4.11
  BOTTOM w0.145: R26.2 78.03,4.88 J4.11
N15388: length 155.6
  SIGNAL w0.112: J4.9 86.28,10.59 89.53,10.59 93.98,15.04 93.98,118.54 92.08,120.45 80.64,120.45 80.01,119.81 80.01,114.1 80.64,113.46 83.19,113.46 85.73,110.92 BNC30.5
  BOTTOM w0.145: R28.2 78.11,6.78 78.74,7.42 80.47,7.42 J4.9
N15398: length 155.5
  SIGNAL w0.112: 85.6,126.16 BNC31.5 85.73,131.88 87,133.15 93.98,133.15 95.25,131.88 95.25,14.4 90.17,9.32 88.27,9.32 85.73,6.78 85.73,4.95 J4.8
  BOTTOM w0.145: J4.8 85.55,2.34 87.16,2.34 88.35,1.14 R30.2
N15404: length 155.9
  SIGNAL w0.112: J4.5 88.82,8.05 90.81,8.05 96.52,13.77 96.52,136.32 88.9,143.94 BNC32.5 85.6,143.94
  BOTTOM w0.145: J4.5 86.87,8.56 88.27,9.96 R32.2

## Copper pours and planes (outline as drawn; the poured copper is in the pictures)
GND on TOP, BOTTOM, SIGNAL, GND: -2.66,-0.33 -2.66,156.13 105.53,156.13 105.53,-0.33

## Text on the board
Ref Des/Silkscreen Top: JA3 | JA4 | JA2 | JA1 | JA7 | JA8 | JB3 | JB4 | JB2 | JB1 | JA10 | JA9 | JB7 | JB8 | JC3 | JC4 | JC2 | JC1 | JB10 | JB9 | JC7 | JC8 | JD3 | JD4 | JD2 | JD1 | JC10 | JC9 | JD7 | JD8 | JD10 | JD9 | QuIQCL PMOD2BNC v1_0
